# Altium PCB Busmaster.PcbDoc
Units mm, origin at the board's own origin, x right, y up, seen from the top; angles counter-clockwise.
Board outline 42.16 x 73.88 mm, 4 copper layers (Top Layer, Layer 1, Layer 2, Bottom Layer), stack 1.803 mm thick; 13 components, 164 nets, 60 pads, 0 vias.
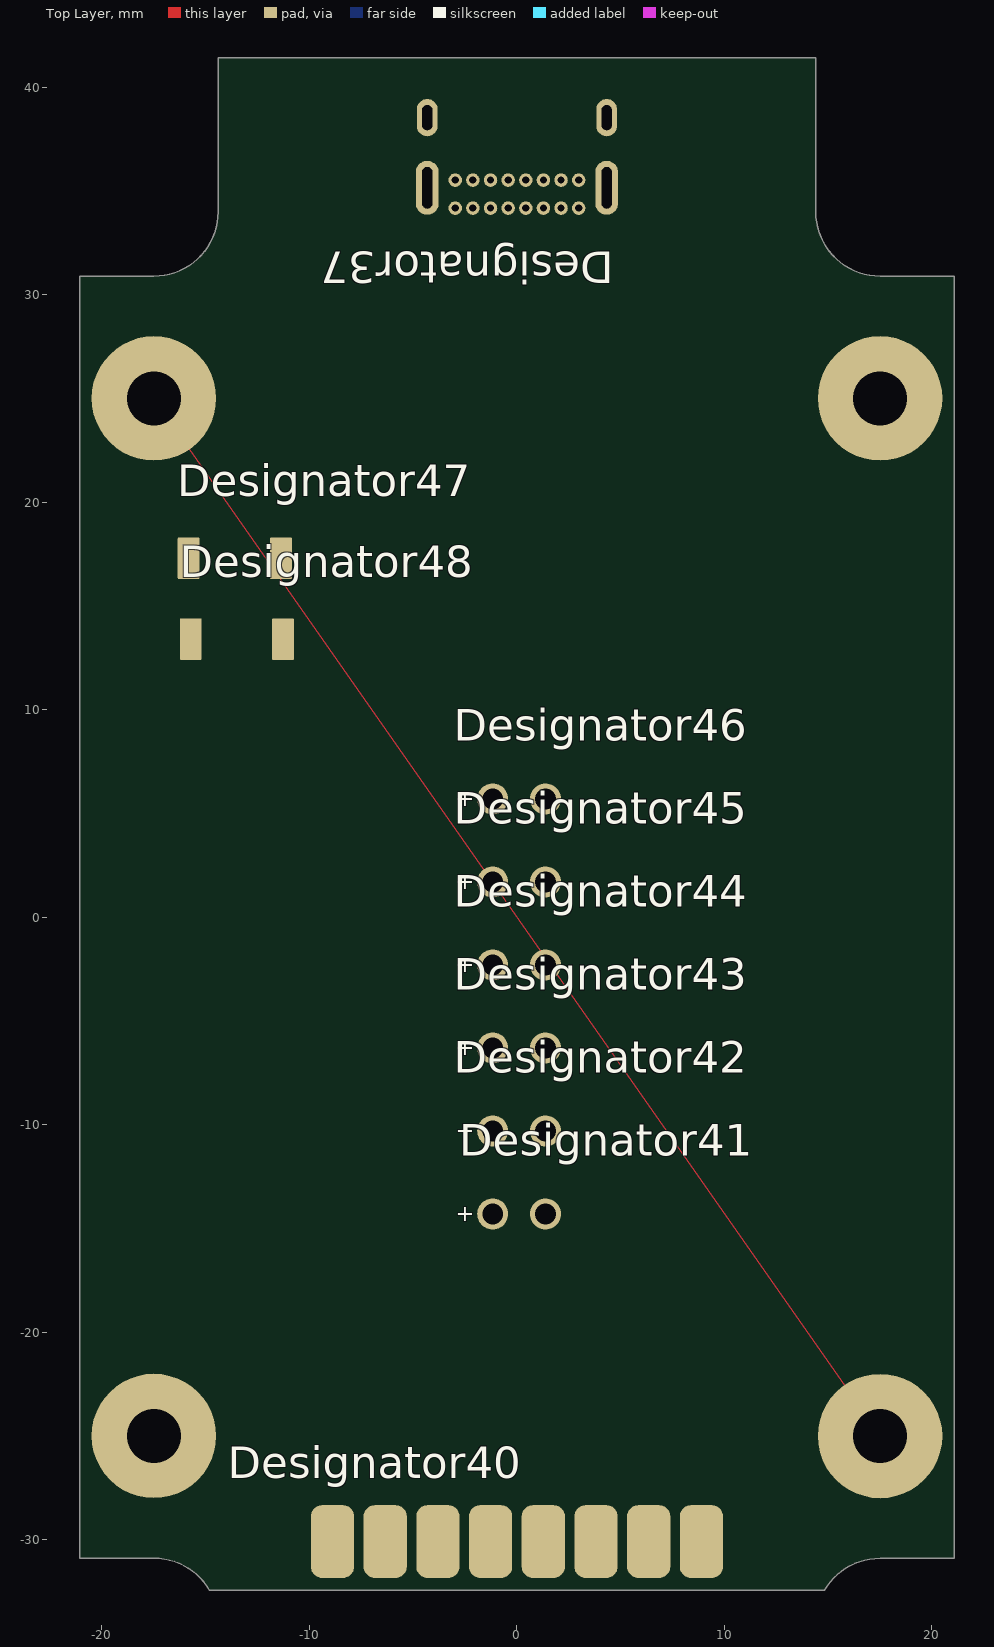
[diagram p0: Top Layer view]
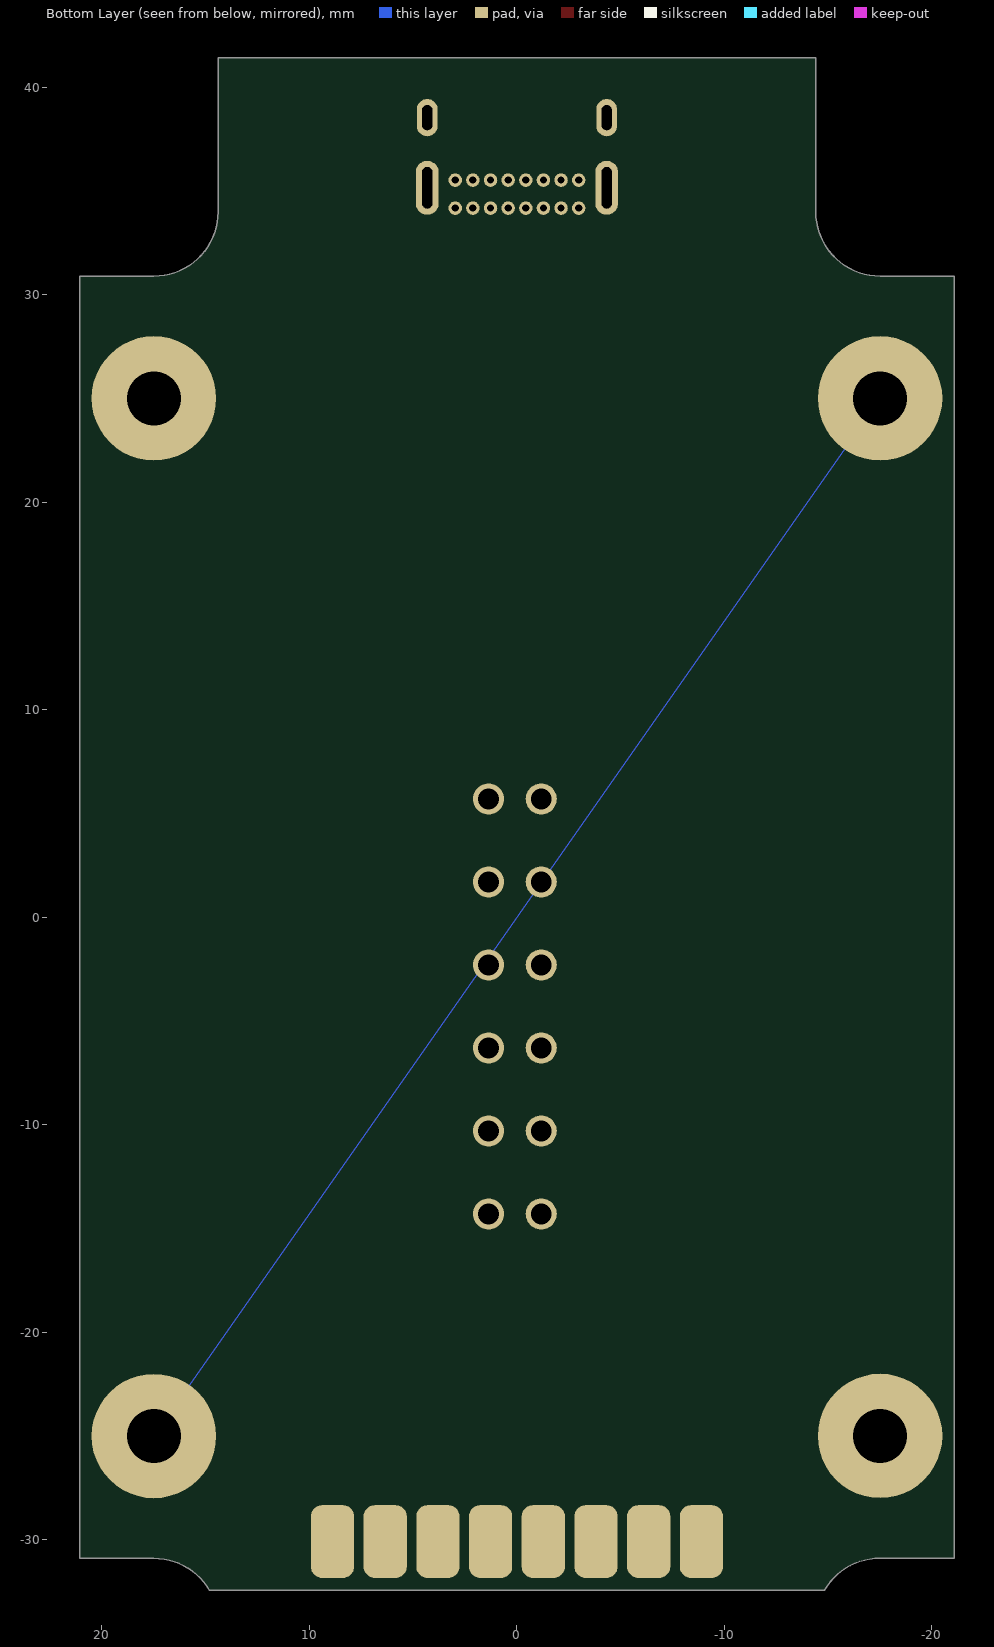
[diagram p1: Bottom Layer view, seen from below]

## Layer stack, top to bottom
Top Solder: solder mask 0.0102, Solder Resist, Dk 3.5
Top Layer: signal copper 0.0356
Dielectric 2: prepreg 0.0711, PP-006, Dk 4.1
Layer 1: signal copper 0.035
Dielectric 1: dielectric 1.52, FR-4, Dk 4.8
Layer 2: signal copper 0.035
Dielectric 3: prepreg 0.0711, PP-006, Dk 4.1
Bottom Layer: signal copper 0.0356
Bottom Solder: solder mask 0.0102, Solder Resist, Dk 3.5

## Board outline
-21.082,-30.898 -21.082,30.898 -17.501,30.898 ccw(c-17.501,33.998) -14.401,33.998 -14.401,41.432 14.401,41.432 14.401,33.998 ccw(c17.501,33.998) 17.501,30.898 21.082,30.898 21.082,-30.898 17.501,-30.898 ccw(c17.501,-33.998) 14.816,-32.448 ccw(c14.801,-32.463) 14.801,-32.442 -14.815,-32.442 ccw(c-17.5,-33.992) -17.5,-30.892 -17.501,-30.898

## Design rules (kind name [scope] priority, off if disabled: settings)
BoardOutlineClearance [All] p1 off: gap=0.5 ignorepadtopadclearanceinfootprint=FALSE
Clearance Clearance_1 [InPolygon vs IsKeepOut] p1: gap=0.5 ignorepadtopadclearanceinfootprint=FALSE
Clearance [All] p2: gap=0.152 ignorepadtopadclearanceinfootprint=FALSE
HoleSize [All] p1: absolutevalues=TRUE maxlimit=10 minlimit=0.025 maxpercent=80.000 minpercent=20.000
MinimumSolderMaskSliver [All] p1: minsoldermaskwidth=0.098
PolygonConnect [All] p1: thpad.connectstyle=Direct thpad.reliefconductorwidth=0.254 thpad.reliefentries=4 thpad.polygonreliefangle="90 Angle" thpad.airgapwidth=0.254 smdpad.connectstyle=Relief smdpad.reliefconductorwidth=0.2 smdpad.reliefentries=4 smdpad.polygonreliefangle="90 Angle" smdpad.airgapwidth=0.2 via.connectstyle=Direct via.reliefconductorwidth=0.254 via.reliefentries=4 via.polygonreliefangle="90 Angle" via.airgapwidth=0.254
RoutingVias [All] p1: holewidth=0.5 width=0.9 viastyle="Through Hole" minholewidth=0.25 minwidth=0.45 maxholewidth=0.6 maxwidth=1
SilkToSilkClearance [All] p1 off: silktosilkclearance=0.15
SilkToSolderMaskClearance [IsPad] p1: minsilkscreentomaskgap=0.05 clearancetoexposedcopper=TRUE
SolderMaskExpansion [All] p1: expansion=0.102 istentingtop=FALSE
SupplyNets "Schematic Supply Nets_5" [InNet('P1V8D')] p1: voltage=0.000
SupplyNets "Schematic Supply Nets_2" [InNet('P3V3D')] p2: voltage=0.000
SupplyNets "Schematic Supply Nets" [InNet('GND')] p3: voltage=0.000
Width [All] p1: maxlimit=2.54 minlimit=0.152 preferedwidth=0.203
26 further rules are at their usual default settings.

## Classes and differential pairs
channel class CPLD-V-HEADERBANK: U_CPLD-V-HEADERBANK1 U_CPLD-V-HEADERBANK2 U_CPLD-V-HEADERBANK3 U_CPLD-V-HEADERBANK4 U_CPLD-V-HEADERBANK5 U_CPLD-V-HEADERBANK6
component class "CPLD-V MAIN": LOGO1 LOGO2

## Components (designator, comment, footprint, x,y, rotation, side; value= is the part's Value field where it differs from the comment)
Designator37 "Comment" CONN-GCT-USB4085 0,38.2 r180 top locked
Designator40 "Comment" CONNECTOR-GENERIC-BOXHEADER-2X8-EDGE 0,-33.9 r0 top locked
Designator41 "Comment" LED-SUNLED-XLUY13D 0.1,-14.3 r0 top
Designator42 "Comment" SWITCH-ESWITCH-TL1105SPF-1RCAP 32.6,-14.8 r0 top
Designator42 "Comment" LED-SUNLED-XLUY13D 0.1,-10.3 r0 top
Designator43 "Comment" LED-SUNLED-XLUY13D 0.1,-6.3 r0 top
Designator44 "Comment" LED-SUNLED-XLUY13D 0.1,-2.3 r0 top
Designator45 "Comment" LED-SUNLED-XLUY13D 0.1,1.7 r0 top
Designator46 "Comment" LED-SUNLED-XLUY13D 0.1,5.7 r0 top
Designator47 "Comment" SWITCH-XUNPU-TS-1088-AR02016 -13.6,17.3 r0 top
Designator48 "Comment" SWITCH-XUNPU-TS-1088-AR02016 -13.5,13.4 r0 top
LOGO1 "LOGO-LICENSE-CC0-PUBLIC" LOGO-LICENSE-CC0-PUBLIC -114.561,94.353 r0 top
LOGO2 "LOGO-LICENSE-CC" LOGO-LICENSE-CC -53.112,93.382 r0 top

## Footprints (in the part's own frame and the unit in brackets; to place one, negate y for a bottom-side part, rotate by r counter-clockwise, add the part's x,y. Pads: shape width x height; smd on the part's side, far side on the other; paste and mask are expansions set on the pad)
CONN-GCT-USB4085 [mm]
  rrect100% 1.1x2.6 hole 0.5 slot 2 at 90 deg paste-2539.97 mask+0.05: 1(-4.325,3.045) 2(4.325,3.045)
  rrect100% 1x1.8 hole 0.5 slot 1.2 at 90 deg paste-2539.97 mask+0.05: 3(-4.325,-0.335) 4(4.325,-0.335)
  round 0.65 hole 0.35 paste-2539.97 mask+0.05: A1(-2.975,4.025) A4(-2.125,4.025) A5(-1.275,4.025) A6(-0.425,4.025) A7(0.425,4.025) A8(1.275,4.025) A9(2.125,4.025) A12(2.975,4.025) B1(2.975,2.675) B4(2.125,2.675) B5(1.275,2.675) B6(0.425,2.675) B7(-0.425,2.675) B8(-1.275,2.675) B9(-2.125,2.675) B12(-2.975,2.675)
  body extent -4.88,-4.83 4.88,4.83, height 0.25
CONNECTOR-GENERIC-BOXHEADER-2X8-EDGE [mm] "CONNECTOR GENERIC-BOXHEADER-2X8"
  rrect50% 2.08x3.5 smd paste-2539.97 mask+0.05: 1(8.89,3.81) 3(6.35,3.81) 5(3.81,3.81) 7(1.27,3.81) 9(-1.27,3.81) 11(-3.81,3.81) 13(-6.35,3.81) 15(-8.89,3.81)
  rrect50% 2.08x3.5 smd far side paste-2539.97 mask+0.05: 2(8.89,3.81) 4(6.35,3.81) 6(3.81,3.81) 8(1.27,3.81) 10(-1.27,3.81) 12(-3.81,3.81) 14(-6.35,3.81) 16(-8.89,3.81)
  body extent -13.92,-7.4 13.9,4.7, height 3.46
LED-SUNLED-XLUY13D [mm] "LED.YELLOW,DIFFUSED,FLAT TOP,2MM LENS,RECTANGLE BODY"
  round 1.5 hole 1: 1(1.27,0) 2(-1.27,0)
  body extent -2.4,-1.26 2.4,1.25, height 10.05
LOGO-LICENSE-CC [mm]
  silkscreen extent -2.08,-2.05 2.03,2.05
LOGO-LICENSE-CC0-PUBLIC [mm]
  silkscreen extent -1.97,-1.98 10.7,1.97
SWITCH-ESWITCH-TL1105SPF-1RCAP [mm] "SWTICH,TACT,MOM,WITH 1R CAP,E-SWITCH TL1105SP"
  round 1.6 hole 1: 1(-3.25,-2.25) 2(3.25,-2.25) 3(-3.25,2.25) 4(3.25,2.275)
  body extent -3.94,-3 3.94,3, height 13.5
SWITCH-XUNPU-TS-1088-AR02016 [mm] "LCSC C720477"
  rrect9% 1.05x2 smd paste+0 mask+0.05: 1(-2.225,0) 2(2.225,0)
  body extent -2.45,-1.45 2.45,1.45, height 2

## Free pads (board coordinates)
  round 6 hole 2.6 paste-2539.97 mask+0.05: ME1(17.501,-25.006) ME2(17.501,25.006) ME3(-17.501,25.006) ME4(-17.5,-25)

## Nets (pads, with @x,y where several pads share a name; then routed paths per layer and width w, separated by ;. In a path a pad name is that pad's centre, name@x,y a point inside that pad or via, vN(x,y) a via of type N, cw(c..) or ccw(c..) an arc to the next point about the centre after c; other vN are vias at no path point)
D0: 
D1: 
D2: 
D3: 
D4: 
D5: 
D6: 
D7: 
GND: 
NetC8_1: 
NetC10_1: 
NetC12_1: 
NetC38_1: 
NetC39_1: 
NetC40_1: 
NetC42_1: 
NetD1_2: 
NetD2_2: 
NetD3_2: 
NetD4_2: 
NetD5_2: 
NetD6_2: 
NetD7_2: 
NetD8_2: 
NetD9_2: 
NetD10_2: 
NetD11_1: 
NetD11_2: 
NetJ2_1: 
NetJ2_3: 
NetJ2_5: 
NetJ2_9: 
NetR1_1: 
NetR2_2: 
NetR11_2: 
NetR12_2: 
NetR13_2: 
NetR14_2: 
NetR15_2: 
NetR16_2: 
NetR17_2: 
NetR18_2: 
NetR19_2: 
NetR20_2: 
NetR21_2: 
NetR22_2: 
NetR23_2: 
NetR24_2: 
NetR25_2: 
NetR26_2: 
NetR35_2: 
NetR37_2: 
NetR38_2: 
NetR40_1: 
NetR41_1: 
NetR42_1: 
NetR43_1: 
NetR44_1: 
NetR45_1: 
NetR48_1: 
NetR49_1: 
NetR50_1: 
NetR51_1: 
NetR60_2: 
NetR61_2: 
NetR62_1: 
NetSW11_3: 
NetU1_12: 
NetU2_2: 
NetU2_3: 
NetU2_30: 
NetU2_32: 
NetU2_33: 
NetU2_34: 
NetU2_36: 
NetU2_43: 
NetU2_44: 
NetU2_45: 
NetU2_46: 
NetU2_48: 
NetU2_49: 
NetU2_50: 
NetU2_52: 
NetU2_53: 
NetU2_54: 
NetU2_55: 
NetU2_57: 
NetU2_58: 
NetU2_59: 
NetU2_60: 
P1V8D: 
P3V3D: 
PIN2: 
PIN3: 
PIN4: 
PIN5: 
PIN6: 
PIN7: 
PIN8: 
PIN15: 
PIN16: 
PIN17: 
PIN18: 
PIN19: 
PIN20: 
PIN21: 
PIN26: 
PIN27: 
PIN28: 
PIN29: 
PIN30: 
PIN33: 
PIN34: 
PIN35: 
PIN36: 
PIN37: 
PIN38: 
PIN39: 
PIN40: 
PIN41: 
PIN42: 
PIN47: 
PIN48: 
PIN49: 
PIN50: 
PIN51: 
PIN52: 
PIN53: 
PIN54: 
PIN55: 
PIN56: 
PIN57: 
PIN58: 
PIN61: 
PIN66: 
PIN67: 
PIN68: 
PIN69: 
PIN70: 
PIN71: 
PIN72: 
PIN73: 
PIN74: 
PIN75: 
PIN76: 
PIN77: 
PIN78: 
PIN81: 
PIN82: 
PIN83: 
PIN84: 
PIN85: 
PIN86: 
PIN87: 
PIN88: 
PIN89: 
R\D\: 
R\X\F\: 
T\X\E\: 
TCK/SK: 
TDI/DO: 
TDO/DI: 
TMCS/CS: 
W\R\: 
pads on no net: Designator37.1 Designator37.2 Designator37.3 Designator37.4 Designator37.A1 Designator37.A4 Designator37.A5 Designator37.A6 Designator37.A7 Designator37.A8 Designator37.A9 Designator37.A12 Designator37.B1 Designator37.B4 Designator37.B5 Designator37.B6 Designator37.B7 Designator37.B8 Designator37.B9 Designator37.B12 Designator40.1 Designator40.2 Designator40.3 Designator40.4 Designator40.5 Designator40.6 Designator40.7 Designator40.8 Designator40.9 Designator40.10 Designator40.11 Designator40.12 Designator40.13 Designator40.14 Designator40.15 Designator40.16 Designator41.1 Designator41.2 Designator42.1 Designator42.2 Designator42.3 Designator42.4 Designator43.1 Designator43.2 Designator44.1 Designator44.2 Designator45.1 Designator45.2 Designator46.1 Designator46.2 Designator47.1 Designator47.2 Designator48.1 Designator48.2

## Keep-outs
Keep-Out Layer:
  lines w0.25: -118.498,-5.723 ccw(c-114.688,-5.723) -114.688,-9.533 -52.458,-9.533 ccw(c-52.458,-5.723) -48.648,-5.723 -48.648,94.607 ccw(c-52.458,94.607) -52.458,98.417 -114.688,98.417 ccw(c-114.688,94.607) -118.498,94.607 -118.498,-5.723

## Other copper
Multi-Layer:
  lines w0.05: -17.501,25.006 17.501,-25.006

## Silkscreen, mask and mechanical layers (free items; w line width, h text height)
Mechanical 1:
  circle w0.15: c-17.501,25.006 r3
  circle w0.15: c-17.501,-25.006 r3
  circle w0.15: c17.501,-25.006 r3
  circle w0.15: c17.501,25.006 r3
  lines w0.05: -17.501,-30.898 -21.082,-30.898 -21.082,-28.028 -21.082,-17.526 -21.082,18.034 -21.082,28.028 -21.082,30.898 -17.501,30.898 ccw(c-17.501,33.998) -14.401,33.998 -14.401,40.386 -14.401,41.432 14.401,41.432 14.401,40.386 14.401,33.998 ccw(c17.501,33.998) 17.501,30.898 21.082,30.898 21.082,28.028 21.082,18.034 21.082,-17.526 21.082,-28.028 21.082,-30.898 17.501,-30.898 ccw(c17.501,-33.998) 14.816,-32.448 ccw(c14.801,-32.463) 14.801,-32.442 -14.815,-32.442 ccw(c-17.5,-33.992) -17.5,-30.892 ; -7.396,43.179 20.049,43.179
Top Assembly:
  lines w0.05: -118.498,-5.723 ccw(c-114.688,-5.723) -114.688,-9.533 -82.938,-9.533 -52.458,-9.533 ccw(c-52.458,-5.723) -48.648,-5.723 -48.648,94.607 ccw(c-52.458,94.607) -52.458,98.417 -114.688,98.417 ccw(c-114.688,94.607) -118.498,94.607 -118.498,-5.723

## Text inside footprints (layer, text, board x,y; h text height)
Designator40: Top Courtyard "BOARD EDGE" at 1.325,-33.259 h1
Designator41: Top Overlay "+" at -2.95,-14.65 h0.8
Designator42: Top Overlay "+" at -2.95,-10.65 h0.8
Designator43: Top Overlay "+" at -2.95,-6.65 h0.8
Designator44: Top Overlay "+" at -2.95,-2.65 h0.8
Designator45: Top Overlay "+" at -2.95,1.35 h0.8
Designator46: Top Overlay "+" at -2.95,5.35 h0.8
LOGO1: Top Overlay "PUBLIC / DOMAIN" at -112.411,92.54 h2.5; Top Overlay "0" at -115.552,92.99 h5